# Altium PCB Grabber.PCBDOC (part 4 of 5)
Units mil, origin at the board's own origin, x right, y up, seen from the top; angles counter-clockwise.
Board outline 2854.33 x 3937 mil, 4 copper layers (TopLayer, Internal Plane 2, Layer 1, Bottom Layer), stack 60.752 mil thick; 159 components, 116 nets, 684 pads, 241 vias.
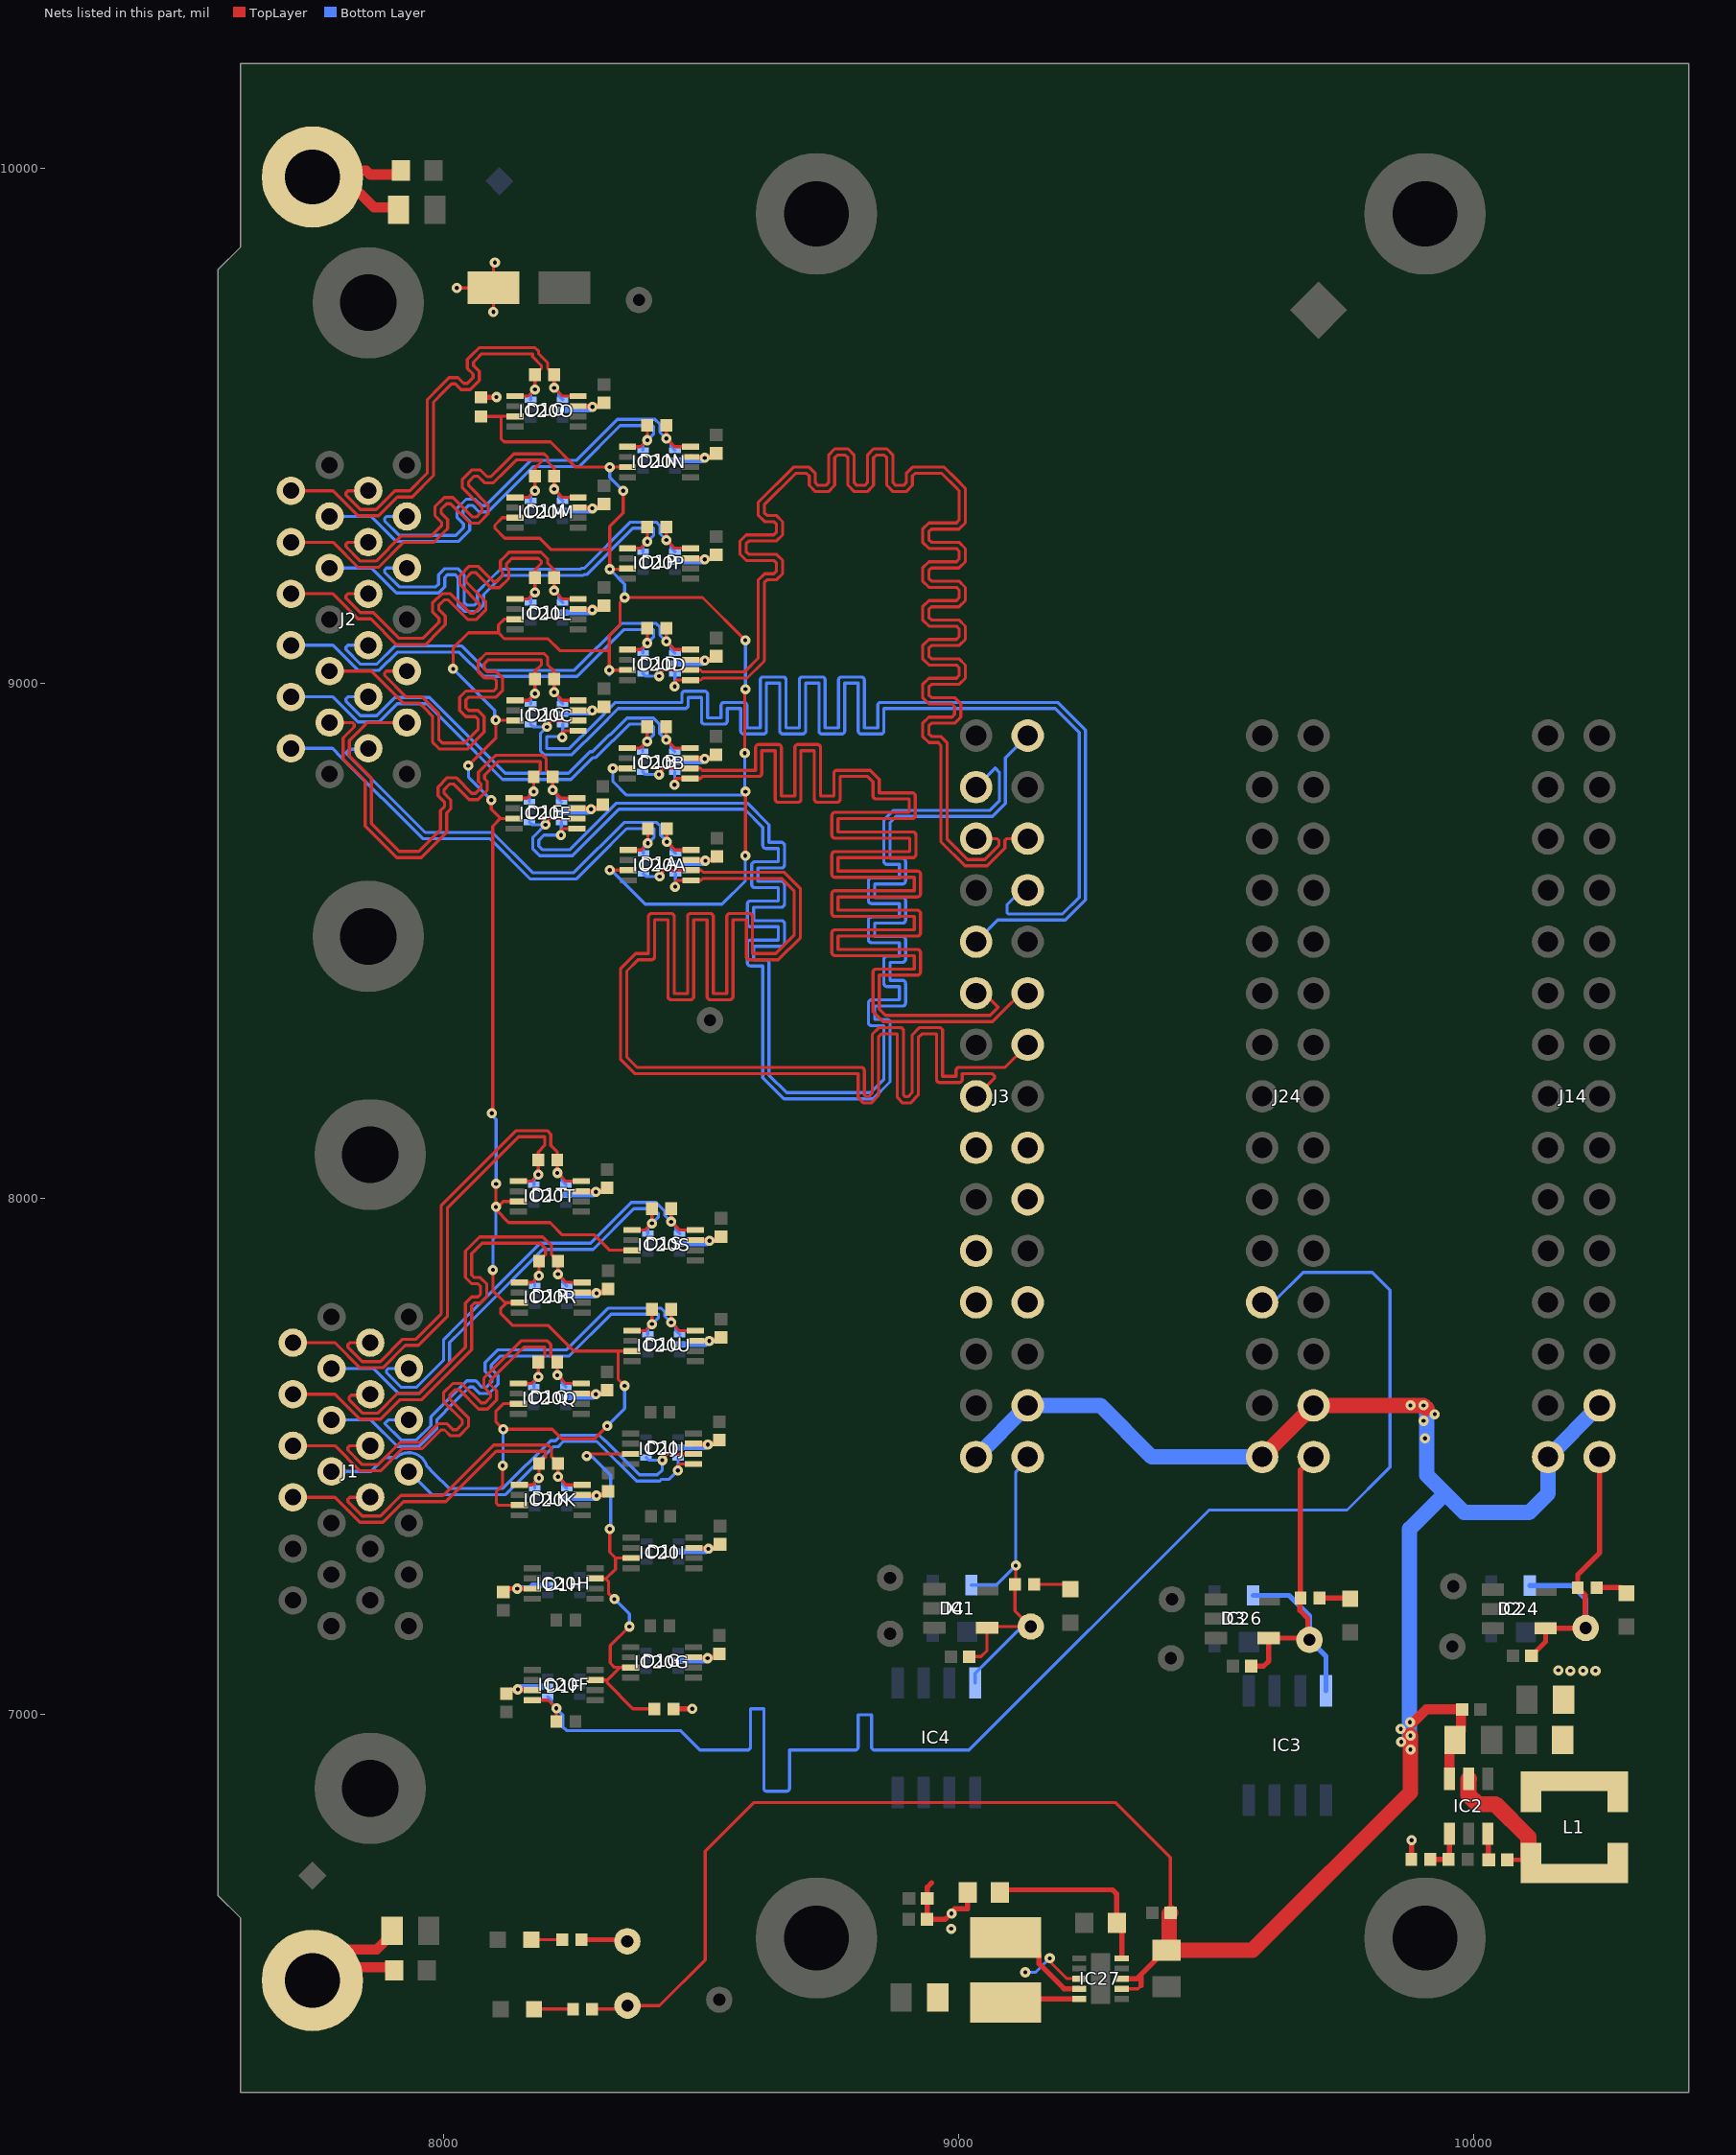
[diagram p5: the nets of this part, all layers, seen from the top]

## Via types
v1: diameter 19.68, hole 7.87, TopLayer to Bottom Layer, tented both sides, 241 vias

## Nets (pads, with @x,y where several pads share a name; then routed paths per layer and width w, separated by ;. In a path a pad name is that pad's centre, name@x,y a point inside that pad or via, vN(x,y) a via of type N, cw(c..) or ccw(c..) an arc to the next point about the centre after c; other vN are vias at no path point) (continued)
LVDS15_P: D1F.4 IC20F.8 J24.23 R131F.2 | length 3074.4
  TopLayer w6: IC20F.8@8172.65,7026.79 8203.4,7026.79 v1(8219.31,7010.88) R131F.2@8219.31,6985.45
  Bottom Layer w6: D1F.4@8202.57,7033.68 8210.06,7026.2 8210.06,7020.13 v1(8219.31,7010.88) 8231.81,6998.38 8231.81,6975.03 8238.84,6968 8460.03,6968 8494.51,6933.51 8498.03,6930 8590,6930 ccw(c8590,6936) 8596,6936 8596,7010 8622,7010 8622,6856 ccw(c8628,6856) 8628,6850 8666,6850 ccw(c8666,6856) 8672,6856 8672,6930 8799,6930 ccw(c8799,6936) 8805,6936 8805,6998.27 8831,6998.27 8831,6936 ccw(c8837,6936) 8837,6930 9019.97,6930 9023.49,6933.51 9485.97,7396 9753.97,7396 9833.49,7475.51 9837,7479.03 9837,7822.97 9833.49,7826.49 9802.97,7857 9668.54,7857 9610.55,7799 J24.23@9589,7799
LVDS16_N: D1E.6 IC20E.5 J3.3 | length 2952.3
  TopLayer w6: v1@8225.05,8702.69 v1(8228.36,8706) 8228.36,8714.42 8232.39,8718.44 IC20E.5@8258.95,8718.44
  Bottom Layer w6: D1E.6@8229.03,8731.24 8229.03,8706.67 v1(8228.36,8706) 8196.43,8706 8195.88,8706.55 8185.36,8696.03 8185.36,8684.35 8191.98,8677.73 8245.76,8677.73 8336.03,8768 8589.97,8768 8632,8725.97 8632,8692 8656,8692 cw(c8656,8686) 8662,8686 8662,8648 cw(c8656,8648) 8656,8642 8610.43,8642 8610.43,8616 8656,8616 cw(c8656,8610) 8662,8610 8662,8572 cw(c8656,8572) 8656,8566 8602,8566 8602,8540 8656,8540 cw(c8656,8534) 8662,8534 8662,8496 cw(c8656,8496) 8656,8490 8602,8490 8602,8464 8626,8464 cw(c8626,8458) 8632,8458 8632,8240 8666,8206 8829,8206 8855,8232 8855,8336 8831,8336 cw(c8831,8342) 8825,8342 8825,8380 cw(c8831,8380) 8831,8386 8885,8386 8885,8412 8861,8412 cw(c8861,8418) 8855,8418 8855,8465 cw(c8861,8465) 8861,8471 8885,8471 8885,8497 8831,8497 cw(c8831,8503) 8825,8503 8825,8541 cw(c8831,8541) 8831,8547 8885,8547 8885,8573 8831,8573 cw(c8831,8579) 8825,8579 8825,8617 cw(c8831,8617) 8831,8623 8885,8623 8885,8649 8861,8649 cw(c8861,8655) 8855,8655 8855,8735.44 8873.56,8754 9061,8754 9078.97,8771.97 9078.97,8828.03 9071,8836 J3.3@9034,8799
LVDS16_P: D1E.1 IC20E.6 J3.2 | length 3040
  TopLayer w6: v1(8198.36,8726) 8198.36,8728.72 8207.77,8738.13 IC20E.6@8258.95,8738.13
  Bottom Layer w6: D1E.1@8166.83,8731.24 8172.06,8726 v1(8198.36,8726) 8176.87,8704.51 8173.36,8701 8173.36,8679.38 8176.87,8675.87 8183.49,8669.25 8187.01,8665.73 8250.73,8665.73 8341,8756 8585,8756 8620,8721 8620,8686 ccw(c8626,8686) 8626,8680 8650,8680 8650,8654 8604.43,8654 ccw(c8604.43,8648) 8598.43,8648 8598.43,8610 ccw(c8604.43,8610) 8604.43,8604 8650,8604 8650,8578 8596,8578 ccw(c8596,8572) 8590,8572 8590,8534 ccw(c8596,8534) 8596,8528 8650,8528 8650,8502 8596,8502 ccw(c8596,8496) 8590,8496 8590,8458 ccw(c8596,8458) 8596,8452 8620,8452 8620,8235.03 8661.03,8194 8833.97,8194 8867,8227.03 8867,8342 ccw(c8861,8342) 8861,8348 8837,8348 8837,8374 8891,8374 ccw(c8891,8380) 8897,8380 8897,8418 ccw(c8891,8418) 8891,8424 8867,8424 8867,8459 8891,8459 ccw(c8891,8465) 8897,8465 8897,8503 ccw(c8891,8503) 8891,8509 8837,8509 8837,8535 8891,8535 ccw(c8891,8541) 8897,8541 8897,8579 ccw(c8891,8579) 8891,8585 8837,8585 8837,8611 8891,8611 ccw(c8891,8617) 8897,8617 8897,8655 ccw(c8891,8655) 8891,8661 8867,8661 8867,8730.46 8878.54,8742 9065.97,8742 9090.97,8767 9090.97,8828.03 9090.97,8855.97 J3.2@9134,8899
LVDS17_N: D1D.6 IC20D.5 J3.6 | length 2990.4
  TopLayer w6: v1(8448.83,8994.39) 8448.83,9002.8 8452.86,9006.83 IC20D.5@8479.43,9006.83 8499.16,9006.83 8503,9010.67 8589.64,9010.67 8619.49,9040.51 8623,9044.03 8623,9185.21 8623,9196.16 8628.14,9201.29 8646.27,9201.29 8658.43,9213.46 8658.43,9238.81 8646.27,9250.98 8592.7,9250.98 8587.57,9256.11 8587.57,9271.53 8592.7,9276.66 8646.27,9276.66 8658.43,9288.83 8658.43,9314.18 8646.27,9326.35 8628.14,9326.35 8623,9331.48 8623,9338 8623,9347 8684.09,9408.09 8693,9408.09 8704.78,9408.09 8709.92,9402.95 8709.92,9384.82 8722.09,9372.65 8747.44,9372.65 8759.61,9384.82 8759.61,9438.38 8764.74,9443.52 8780.15,9443.52 8785.29,9438.38 8785.29,9384.82 8797.46,9372.65 8822.81,9372.65 8834.98,9384.82 8834.98,9438.38 8840.11,9443.52 8855.52,9443.52 8860.66,9438.38 8860.66,9384.82 8872.83,9372.65 8898.18,9372.65 8910.35,9384.82 8910.35,9402.95 8915.48,9408.09 8967.15,9408.09 8995.88,9379.36 9001.02,9374.22 9001.02,9332.4 ; 9001.02,9327.98 9001.02,9332.4 ; J3.6@9134,8699 9093.52,8699 9090,8695.49 9090,8680.76 9055.75,8646.5 9012.26,8646.5 8965.59,8693.18 8965.59,8826.16 8965.59,8880.18 8960.45,8885.32 8942.32,8885.32 8930.15,8897.49 8930.15,8922.84 8942.32,8935.01 8987.12,8935.01 8992.25,8940.14 8992.25,8955.55 8987.12,8960.69 8942.32,8960.69 8930.15,8972.86 8930.15,8998.21 8942.32,9010.38 8995.88,9010.38 9001.02,9015.51 9001.02,9030.92 8995.88,9036.06 8942.32,9036.06 8930.15,9048.23 8930.15,9073.58 8942.32,9085.75 8995.88,9085.75 9001.02,9090.88 9001.02,9106.29 8995.88,9111.43 8942.32,9111.43 8930.15,9123.6 8930.15,9148.95 8942.32,9161.12 8995.88,9161.12 9001.02,9166.25 9001.02,9181.66 8995.88,9186.8 8942.32,9186.8 8930.15,9198.97 8930.15,9224.32 8942.32,9236.49 8995.88,9236.49 9001.02,9241.62 9001.02,9257.03 8995.88,9262.17 8942.32,9262.17 8930.15,9274.34 8930.15,9299.69 8942.32,9311.86 8995.88,9311.86 9001.02,9316.99 9001.02,9332.4
  Bottom Layer w6: v1(8448.83,8994.39) 8449.5,8995.06 D1D.6@8449.5,9019.62
LVDS17_P: D1D.1 IC20D.6 J3.5 | length 3005.3
  TopLayer w6: v1(8418.83,9014.39) 8418.83,9017.1 8428.24,9026.51 IC20D.6@8479.43,9026.51 8499.16,9026.51 8503,9022.67 8584.67,9022.67 8611,9049 8611,9185.21 8611,9201.13 8623.17,9213.29 8641.3,9213.29 8646.43,9218.43 8646.43,9233.84 8641.3,9238.98 8587.73,9238.98 8575.57,9251.14 8575.57,9276.5 8587.73,9288.66 8641.3,9288.66 8646.43,9293.8 8646.43,9309.21 8641.3,9314.35 8623.17,9314.35 8611,9326.51 8611,9338 8611,9351.97 8679.12,9420.09 8693,9420.09 8709.75,9420.09 8721.92,9407.92 8721.92,9389.79 8727.06,9384.65 8742.47,9384.65 8747.61,9389.79 8747.61,9443.35 8759.77,9455.52 8785.12,9455.52 8797.29,9443.35 8797.29,9389.79 8802.43,9384.65 8817.84,9384.65 8822.98,9389.79 8822.98,9443.35 8835.14,9455.52 8860.49,9455.52 8872.66,9443.35 8872.66,9389.79 8877.8,9384.65 8893.21,9384.65 8898.35,9389.79 8898.35,9407.92 8910.51,9420.09 8920.45,9420.09 8972.12,9420.09 8995.88,9396.33 9013.02,9379.19 9013.02,9337.38 ; 9013.02,9332.95 9013.02,9337.38 ; J3.5@9034,8699 9074.49,8699 9078,8695.49 9078,8685.73 9050.78,8658.5 9017.23,8658.5 8977.59,8698.15 8977.59,8826.16 8977.59,8885.16 8965.42,8897.32 8947.29,8897.32 8942.15,8902.46 8942.15,8917.87 8947.29,8923.01 8992.09,8923.01 9004.25,8935.17 9004.25,8960.53 8992.09,8972.69 8947.29,8972.69 8942.15,8977.83 8942.15,8993.24 8947.29,8998.38 9000.85,8998.38 9013.02,9010.54 9013.02,9035.9 9000.85,9048.06 8947.29,9048.06 8942.15,9053.2 8942.15,9068.61 8947.29,9073.75 9000.85,9073.75 9013.02,9085.91 9013.02,9111.27 9000.85,9123.43 8947.29,9123.43 8942.15,9128.57 8942.15,9143.98 8947.29,9149.12 9000.85,9149.12 9013.02,9161.28 9013.02,9186.64 9000.85,9198.8 8947.29,9198.8 8942.15,9203.94 8942.15,9219.35 8947.29,9224.49 9000.85,9224.49 9013.02,9236.65 9013.02,9262.01 9000.85,9274.17 8947.29,9274.17 8942.15,9279.31 8942.15,9294.72 8947.29,9299.86 9000.85,9299.86 9013.02,9312.02 9013.02,9337.38
  Bottom Layer w6: D1D.1@8387.3,9019.62 8392.54,9014.39 v1(8418.83,9014.39)
LVDS18_N: D1C.6 IC20C.5 J3.9 | length 3068.2
  TopLayer w6: v1@8229.76,8897.12 v1(8230.92,8895.96) ; v1@8232.39,8894.5 v1(8230.92,8895.96) ; IC20C.5@8261.51,8908.4 8234.94,8908.4 8230.92,8904.38 v1(8230.92,8895.96)
  Bottom Layer w6: D1C.6@8231.59,8921.2 8231.59,8896.63 v1(8230.92,8895.96) 8229.76,8897.12 8200.59,8897.12 8200.59,8874 8244.79,8874 8291.89,8921.11 8334.27,8963.49 8463,8963.49 8463,8979.22 cw(c8469,8979.22) 8469,8985.22 8507,8985.22 cw(c8507,8979.22) 8513,8979.22 8513,8933.43 8539,8933.43 8539,8957.49 cw(c8545,8957.49) 8545,8963.49 8583,8963.49 cw(c8583,8957.49) 8589,8957.49 8589,8914.15 8615,8914.15 8615,9006.82 cw(c8621,9006.82) 8621,9012.82 8659,9012.82 cw(c8659,9006.82) 8665,9006.82 8665,8914.15 8691,8914.15 8691,9006.82 cw(c8697,9006.82) 8697,9012.82 8735,9012.82 cw(c8735,9006.82) 8741,9006.82 8741,8914.15 8767,8914.15 8767,9006.82 cw(c8773,9006.82) 8773,9012.82 8811,9012.82 cw(c8811,9006.82) 8817,9006.82 8817,8914.15 8843,8914.15 8843,8957.49 cw(c8849,8957.49) 8849,8963.49 9150,8963.49 ; J3.9@9034,8499 9076,8541 9206.97,8541 9210.49,8544.51 ; 9150,8963.49 9192.49,8963.49 ; 9150,8963.49 9192.49,8963.49 ; 9192.49,8963.49 9246,8909.97 ; 9192.49,8963.49 9246,8909.97 ; 9210.49,8544.51 9246,8580.03 ; 9210.49,8544.51 9246,8580.03 ; 9246,8580.03 9246,8909.97 ; 9246,8580.03 9246,8909.97
LVDS18_P: D1C.1 IC20C.6 J3.8 | length 3029.8
  TopLayer w6: v1@8200.92,8913.84 v1(8200.92,8915.96) 8200.92,8918.68 8210.33,8928.09 IC20C.6@8261.51,8928.09
  Bottom Layer w6: D1C.1@8169.39,8921.2 8174.62,8915.96 v1(8200.92,8915.96) 8188.59,8903.63 8188.59,8869.03 8195.62,8862 8249.76,8862 8300.38,8912.62 8339.24,8951.49 8469,8951.49 ccw(c8469,8957.49) 8475,8957.49 8475,8973.22 8501,8973.22 8501,8927.43 ccw(c8507,8927.43) 8507,8921.43 8545,8921.43 ccw(c8545,8927.43) 8551,8927.43 8551,8951.49 8577,8951.49 8577,8908.15 ccw(c8583,8908.15) 8583,8902.15 8621,8902.15 ccw(c8621,8908.15) 8627,8908.15 8627,9000.82 8653,9000.82 8653,8908.15 ccw(c8659,8908.15) 8659,8902.15 8697,8902.15 ccw(c8697,8908.15) 8703,8908.15 8703,9000.82 8729,9000.82 8729,8908.15 ccw(c8735,8908.15) 8735,8902.15 8773,8902.15 ccw(c8773,8908.15) 8779,8908.15 8779,9000.82 8805,9000.82 8805,8908.15 ccw(c8811,8908.15) 8811,8902.15 8849,8902.15 ccw(c8849,8908.15) 8855,8908.15 8855,8951.49 9150,8951.49 9187.51,8951.49 ; J3.8@9134,8599 9122,8599 9094,8571 9094,8555 9096,8553 9202,8553 ; 9156,8951.49 9187.51,8951.49 ; 9187.51,8951.49 9234,8905 ; 9187.51,8951.49 9234,8905 ; 9202,8553 9234,8585 ; 9202,8553 9234,8585 ; 9234,8585 9234,8905 ; 9234,8585 9234,8905
LVDS19_N: D1B.6 IC20B.5 J3.12 | length 2967
  TopLayer w6: v1(8448.44,8803.44) 8448.44,8811.86 8452.46,8815.88 IC20B.5@8479.03,8815.88 8498.76,8815.88 8502.61,8819.72 8612,8819.72 ccw(c8612,8825.72) 8618,8825.72 8618,8869.72 8644,8869.72 8644,8775.72 ccw(c8650,8775.72) 8650,8769.72 8688,8769.72 ccw(c8688,8775.72) 8694,8775.72 8694,8869.72 8720,8869.72 8720,8775.72 ccw(c8726,8775.72) 8726,8769.72 8764,8769.72 ccw(c8764,8775.72) 8770,8775.72 8770,8819.72 8823.41,8819.72 8834,8809.13 8834,8782 ccw(c8840,8782) 8840,8776 8904,8776 8904,8750 8760,8750 ccw(c8760,8744) 8754,8744 8754,8706 ccw(c8760,8706) 8760,8700 8904.98,8700 8904.98,8674 8760,8674 ccw(c8760,8668) 8754,8668 8754,8630 ccw(c8760,8630) 8760,8624 8914,8624 8914,8598 8760,8598 ccw(c8760,8592) 8754,8592 8754,8554 ccw(c8760,8554) 8760,8548 8914,8548 8914,8522 8760,8522 ccw(c8760,8516) 8754,8516 8754,8478 ccw(c8760,8478) 8760,8472 8914,8472 8914,8446 8840,8446 ccw(c8840,8440) 8834,8440 8834,8363.46 8853.46,8344 9065.97,8344 9085.49,8363.51 9120.97,8399 J3.12@9134,8399
  Bottom Layer w6: v1(8448.44,8803.44) 8449.11,8804.11 D1B.6@8449.11,8828.68
LVDS19_P: D1B.1 IC20B.6 J3.11 | length 2999.7
  TopLayer w6: v1(8418.44,8823.44) 8418.44,8826.16 8427.85,8835.57 IC20B.6@8479.03,8835.57 8498.76,8835.57 8502.61,8831.72 8606,8831.72 8606,8875.72 cw(c8612,8875.72) 8612,8881.72 8650,8881.72 cw(c8650,8875.72) 8656,8875.72 8656,8781.72 8682,8781.72 8682,8875.72 cw(c8688,8875.72) 8688,8881.72 8726,8881.72 cw(c8726,8875.72) 8732,8875.72 8732,8781.72 8758,8781.72 8758,8825.72 cw(c8764,8825.72) 8764,8831.72 8828.38,8831.72 8846,8814.1 8846,8788 8910,8788 cw(c8910,8782) 8916,8782 8916,8744 cw(c8910,8744) 8910,8738 8766,8738 8766,8712 8910.98,8712 cw(c8910.98,8706) 8916.98,8706 8916.98,8668 cw(c8910.98,8668) 8910.98,8662 8766,8662 8766,8636 8920,8636 cw(c8920,8630) 8926,8630 8926,8592 cw(c8920,8592) 8920,8586 8766,8586 8766,8560 8920,8560 cw(c8920,8554) 8926,8554 8926,8516 cw(c8920,8516) 8920,8510 8766,8510 8766,8484 8920,8484 cw(c8920,8478) 8926,8478 8926,8440 cw(c8920,8440) 8920,8434 8846,8434 8846,8368.43 8858.43,8356 9061,8356 9077,8372 9050,8399 J3.11@9034,8399
  Bottom Layer w6: D1B.1@8386.91,8828.68 8392.14,8823.44 v1(8418.44,8823.44) ; J3.11@9034,8399 J3.11@9050.94,8399
LVDS20_N: D1A.6 IC20A.5 J3.15 | length 2987
  TopLayer w6: v1(8449.82,8605.65) 8449.82,8614.06 8453.84,8618.09 IC20A.5@8480.41,8618.09 8500.14,8618.09 8503.98,8621.93 8656.07,8621.93 8681,8597 8681,8512 8645,8476 8600,8476 8600,8547.61 ccw(c8594,8547.61) 8594,8553.61 8556,8553.61 ccw(c8556,8547.61) 8550,8547.61 8550,8398.39 8524,8398.39 8524,8547.61 ccw(c8518,8547.61) 8518,8553.61 8480,8553.61 ccw(c8480,8547.61) 8474,8547.61 8474,8398.39 8448,8398.39 8448,8547.61 ccw(c8442,8547.61) 8442,8553.61 8404,8553.61 ccw(c8404,8547.61) 8398,8547.61 8398,8476 8373.03,8476 8344.02,8446.99 8344.02,8270.01 8371.03,8243 8805,8243 8805,8196.54 8815.54,8186 8830.46,8186 8844.49,8200.03 8844.49,8314.46 8850.03,8320 8881,8320 8881,8196.54 8891.54,8186 8906.46,8186 8921.73,8201.27 8921.73,8313.21 8928.51,8320 8957,8320 8957,8231.75 ccw(c8963,8231.75) 8963,8225.75 9001,8225.75 ccw(c9001,8231.75) 9007,8231.75 9007,8243 9065,8243 9070,8238 9070,8235 J3.15@9034,8199
  Bottom Layer w6: v1(8449.82,8605.65) 8450.49,8606.32 D1A.6@8450.49,8630.88
LVDS20_P: D1A.1 IC20A.6 J3.14 | length 3051.1
  TopLayer w6: v1(8419.82,8625.65) 8419.82,8628.36 8429.23,8637.77 IC20A.6@8480.41,8637.77 8500.14,8637.77 8503.98,8633.93 8661.04,8633.93 8693,8601.97 8693,8507.03 8649.97,8464 8594,8464 cw(c8594,8470) 8588,8470 8588,8541.61 8562,8541.61 8562,8392.39 cw(c8556,8392.39) 8556,8386.39 8518,8386.39 cw(c8518,8392.39) 8512,8392.39 8512,8541.61 8486,8541.61 8486,8392.39 cw(c8480,8392.39) 8480,8386.39 8442,8386.39 cw(c8442,8392.39) 8436,8392.39 8436,8541.61 8410,8541.61 8410,8470 cw(c8404,8470) 8404,8464 8378,8464 8356.02,8442.02 8356.02,8274.98 8376,8255 8811,8255 cw(c8811,8249) 8817,8249 8817,8201.51 8820.51,8198 8825.49,8198 8832.49,8205 8832.49,8319.43 8845.06,8332 8887,8332 cw(c8887,8326) 8893,8326 8893,8201.51 8896.51,8198 8901.49,8198 8909.73,8206.24 8909.73,8318.18 8923.54,8332 8963,8332 cw(c8963,8326) 8969,8326 8969,8237.75 8995,8237.75 8995,8249 cw(c9001,8249) 9001,8255 9065,8255 9090,8255 J3.14@9134,8299
  Bottom Layer w6: D1A.1@8388.28,8630.88 8393.52,8625.65 v1(8419.82,8625.65)
LVDS21_N: J3.18
LVDS21_P: J3.17
LVDS22_N: J3.21
LVDS22_P: J3.20
LVDS23_N: J3.24
LVDS23_P: J3.23
NetB12_1: B12.1 C1.1 R5.2 | length 384.6
  TopLayer w20: C1.1@7913.05,9919.32 7913.05,9923.97 7865.53,9923.97 7806.49,9983 B12.1@7746,9983 7759,9996 7850.11,9996 7858.08,9988.03 7917.85,9988.03 R5.2@7917.85,9996
NetB13_1: B13.1 C2.1 R6.2 | length 337.1
  TopLayer w20: B13.1@7746,6483 B13.1@7771.38,6508.38 ; C2.1@7900.57,6578.99 7900.57,6573.09 7870.48,6543 7806,6543 B13.1@7771.38,6508.38 ; R6.2@7904.5,6502.22 7904.5,6508.38 B13.1@7771.38,6508.38
NetC4_1: C4.1 IC2.6 | length 51.5
  TopLayer w10: C4.1@10025,6718 10028.2,6721.2 10028.2,6767.05 IC2.6@10027.4,6767.85
NetC4_2: C4.2 IC2.2 L1.1 | length 246.7
  TopLayer w8: C4.2@10064.43,6717 10091,6717 L1.1@10093,6719
  TopLayer w31.5: IC2.2@9990,6874.15 9989,6873.15 9989,6843.45 10007.45,6825 10042,6825 10106,6761 L1.1@10106,6726
NetIC2_4: IC2.4 R10.1 R11.2 | length 79
  TopLayer w10: R10.1@9920,6721 9920,6719.92 9921.92,6718 R11.2@9950.99,6718 ; R11.2@9950,6723 9950.39,6723 9952.6,6725.2 IC2.4@9952.6,6767.85
NetIC27_5: IC27.5 R121.1 R122.2 | length 360.8
  TopLayer w10: R121.1@9080.41,6653.8 9085.41,6658.8 9298.83,6658.8 9306.79,6650.84 R122.2@9306.79,6594.74 9316.63,6584.9 IC27.5@9316.63,6525.84
NetIC27_9: IC27.9 L2.1 | length 194.7
  TopLayer w10: L2.1@9091,6565.99 9123.42,6565.99 9156.01,6533.4 9156.01,6515.17 9204.4,6466.79 IC27.9@9233.95,6466.79
NetLD1_2: LD1.2 R7.2 | length 62
  TopLayer w10: R7.2@10238.5,7245.34 10285.14,7245.34 LD1.2@10296,7234.48
NetLD5_2: LD5.2 R1.1 | length 75.8
  TopLayer w6: LD5.2@8175.88,6427.42 R1.1@8251.67,6427.42
NetLD6_2: LD6.2 R2.2 | length 60.4
  TopLayer w6: LD6.2@8170.48,6562 R2.2@8230.92,6562
NetLD7_2: LD7.2 R3.2 | length 74.3
  TopLayer w6: R3.2@9146.5,7251.56 9207.92,7251.56 LD7.2@9217,7242.48
NetLD8_2: LD8.2 R4.2 | length 60.1
  TopLayer w10: R4.2@9700.5,7225.05 9758.4,7225.05 LD8.2@9759.97,7223.48
P3V3: B10.1 C7.2 C8.2 C47A.2 C47B.2 C47C.2 C47D.2 C47E.2 C47F.2 C47G.2 C47H.2 C47I.2 C47J.2 C47K.2 C47L.2 C47M.2 C47N.2 C47O.2 C47P.2 C47Q.2 C47R.2 C47S.2 C47T.2 C47U.2 C59.2 C62.1 C65.2 C66.2 D1A.5 D1B.5 D1C.5 D1D.5 D1E.5 D1F.5 D1G.5 D1H.5 D1I.5 D1J.5 D1K.5 D1L.5 D1M.5 D1N.5 D1O.5 D1P.5 D1Q.5 D1R.5 D1S.5 D1T.5 D1U.5 IC20A.7 IC20B.7 IC20C.7 IC20D.7 IC20E.7 IC20F.7 IC20G.7 IC20H.7 IC20I.7 IC20J.7 IC20K.7 IC20L.7 IC20M.7 IC20N.7 IC20O.7 IC20P.7 IC20Q.7 IC20R.7 IC20S.7 IC20T.7 IC20U.7 IC27.8 IC27.10 L1.2 L2.2 R2.1 R8.1 R9.1 R10.2 R121.2 | length 3235.8
  TopLayer w6: v1(8026.24,9768) C62.1@8097.1,9768 ; v1(8097.1,9721.43) C62.1@8097.1,9768 ; v1(8100,9817.21) 8097.1,9814.32 C62.1@8097.1,9768 ; IC20C.7@8261.51,8947.77 8261.57,8947.82 8288.95,8947.82 v1(8289,8947.88) 8304.71,8947.88 8304.82,8947.77 C47C.2@8311.71,8954.66 ; v1(9176.85,6525.83) 9176.85,6519.95 9210.33,6486.47 IC27.8@9233.95,6486.47
  TopLayer w10: R8.1@8073,9555.5 8102.46,9555.5 v1(8103,9556.04) ; C47H.2@8116.3,7237.02 8122.6,7243.32 v1(8143.24,7243.32) IC20H.7@8171.29,7243.32 ; C47F.2@8122.46,7039.58 8129.35,7046.47 8129.35,7046.29 8129.66,7045.98 8142.75,7045.98 v1(8144.6,7047.83) 8145.28,7047.15 8171.97,7047.15 IC20F.7@8172.65,7046.47 ; IC20E.7@8258.95,8757.81 8259.86,8756.91 8285.65,8756.91 v1(8286.55,8756) 8288.4,8757.85 8302.22,8757.85 8302.26,8757.81 C47E.2@8309.15,8764.7 ; IC20L.7@8261.51,9144.62 8262.42,9143.72 8288.2,9143.72 v1(8289.11,9142.81) 8290.96,9144.66 8304.78,9144.66 8304.82,9144.62 C47L.2@8311.71,9151.51 ; IC20M.7@8261.51,9341.75 8262.42,9340.84 8288.2,9340.84 v1(8289.11,9339.94) 8290.96,9341.79 8304.78,9341.79 8304.82,9341.75 C47M.2@8311.71,9348.64 ; IC20O.7@8261.51,9538.32 8262.19,9537.64 8288.88,9537.64 v1(8289.56,9536.97) 8291.42,9538.82 8304.5,9538.82 8304.82,9538.5 8304.82,9538.32 C47O.2@8311.71,9545.21 ; IC20Q.7@8267.81,7621.98 8311.12,7621.98 C47Q.2@8318.01,7628.87 ; IC20T.7@8267.81,8014.66 8268.49,8013.98 8295.18,8013.98 v1(8295.86,8013.3) 8297.72,8015.16 8310.8,8015.16 8311.12,8014.84 8311.12,8014.66 C47T.2@8318.01,8021.55 ; R2.1@8267.93,6562 8353.98,6562 B10.1@8356.98,6559 ; IC20K.7@8269.19,7425.17 8269.87,7424.49 8296.56,7424.49 v1(8297.24,7423.82) 8299.09,7425.67 8312.18,7425.67 8312.5,7425.35 8312.5,7425.17 C47K.2@8319.39,7432.06 ; IC20R.7@8269.19,7818.17 8269.87,7817.49 8296.56,7817.49 v1(8297.24,7816.81) 8299.09,7818.66 8312.18,7818.66 8312.5,7818.35 8312.5,7818.17 C47R.2@8319.39,7825.06 ; R9.1@8446.75,7010 v1(8483,7010) ; IC20B.7@8479.03,8855.25 8479.71,8854.57 8506.4,8854.57 v1(8507.08,8853.89) 8508.94,8855.75 8522.02,8855.75 8522.34,8855.43 8522.34,8855.25 C47B.2@8529.23,8862.14 ; IC20D.7@8479.43,9046.2 8480.1,9045.52 8506.8,9045.52 v1(8507.48,9044.84) 8509.33,9046.69 8522.42,9046.69 8522.73,9046.38 8522.73,9046.2 C47D.2@8529.62,9053.09 ; IC20P.7@8479.43,9243.05 8480.33,9242.14 8506.12,9242.14 v1(8507.02,9241.24) 8508.88,9243.09 8522.69,9243.09 8522.73,9243.05 C47P.2@8529.62,9249.94 ; IC20N.7@8479.43,9439.9 8480.33,9438.99 8506.12,9438.99 v1(8507.02,9438.09) 8508.88,9439.94 8522.69,9439.94 8522.73,9439.9 C47N.2@8529.62,9446.79 ; IC20A.7@8480.41,8657.46 8481.09,8656.78 8507.78,8656.78 v1(8508.46,8656.1) 8510.31,8657.95 8523.4,8657.95 8523.72,8657.64 8523.72,8657.46 C47A.2@8530.61,8664.35 ; IC20G.7@8485.33,7110.17 8486.24,7109.27 8512.02,7109.27 v1(8512.93,7108.36) 8514.78,7110.22 8528.6,7110.22 8528.64,7110.17 C47G.2@8535.53,7117.06 ; IC20J.7@8485.61,7524.58 8486.51,7523.68 8512.3,7523.68 v1(8513.2,7522.77) 8515.06,7524.62 8528.87,7524.62 8528.91,7524.58 C47J.2@8535.8,7531.47 ; IC20I.7@8486.71,7322.5 8487.61,7321.59 8513.4,7321.59 v1(8514.31,7320.69) 8516.16,7322.54 8529.97,7322.54 8530.02,7322.5 C47I.2@8536.91,7329.39 ; IC20U.7@8488.68,7724.35 8488.85,7724.17 8515.83,7724.17 v1(8516,7724) 8517.85,7725.85 8531.67,7725.85 8531.99,7725.54 8531.99,7724.35 C47U.2@8538.88,7731.24 ; IC20S.7@8488.68,7919.86 8489.36,7919.18 8516.05,7919.18 v1(8516.73,7918.5) 8518.58,7920.35 8531.67,7920.35 8531.98,7920.04 8531.98,7919.86 C47S.2@8538.87,7926.75 ; C59.2@8938.68,6601.63 C59.2@8939.04,6601.63 ; 8948,6672.76 8939.04,6663.8 C65.2@8939.04,6641.98 C59.2@8939.04,6601.63 ; 8976,6603.6 8974.03,6601.63 C59.2@8939.04,6601.63 ; v1(8986.25,6612.68) 8986.25,6615.3 8992.32,6621.37 8992.32,6622.33 9017.42,6622.33 R121.2@9017.42,6653.8 ; L2.2@9091,6440.01 9098.09,6447.1 IC27.10@9233.95,6447.1 ; R10.2@9878.5,6718 9878.75,6718.25 9878.75,6754.75 v1(9879,6755)
  Bottom Layer w6: D1C.5@8231.59,8940.88 8283.13,8940.88 8289,8946.76 v1(8289,8947.88) ; v1(9129.33,6498.68) 9149.7,6498.68 v1(9176.85,6525.83)
  Bottom Layer w10: v1(8143.24,7243.32) 8145.09,7245.17 8168.04,7245.17 8173.08,7250.21 D1H.5@8202.57,7250.21 ; v1(8144.6,7047.83) 8150.13,7053.36 D1F.5@8202.57,7053.36 ; D1E.5@8229.03,8750.92 8281.47,8750.92 v1(8286.55,8756) ; D1L.5@8231.59,9137.73 8284.03,9137.73 v1(8289.11,9142.81) ; D1M.5@8231.59,9334.86 8284.03,9334.86 v1(8289.11,9339.94) ; D1O.5@8231.59,9531.43 8284.03,9531.43 v1(8289.56,9536.97) ; D1Q.5@8237.89,7615.09 8290.33,7615.09 v1(8295.86,7620.63) ; D1T.5@8237.89,8007.77 8290.33,8007.77 v1(8295.86,8013.3) ; D1K.5@8239.27,7418.28 8291.71,7418.28 v1(8297.24,7423.82) ; D1R.5@8239.27,7811.28 8291.71,7811.28 v1(8297.24,7816.81) ; D1B.5@8449.11,8848.36 8501.55,8848.36 v1(8507.08,8853.89) ; D1D.5@8449.5,9039.31 8501.94,9039.31 v1(8507.48,9044.84) ; D1P.5@8449.5,9236.16 8501.94,9236.16 v1(8507.02,9241.24) ; D1N.5@8449.5,9433.01 8501.94,9433.01 v1(8507.02,9438.09) ; D1A.5@8450.49,8650.57 8502.93,8650.57 v1(8508.46,8656.1) ; D1G.5@8455.41,7103.28 8507.85,7103.28 v1(8512.93,7108.36) ; D1J.5@8455.69,7517.69 8508.13,7517.69 v1(8513.2,7522.77) ; D1I.5@8456.79,7315.61 8509.23,7315.61 v1(8514.31,7320.69) ; D1U.5@8458.76,7717.46 8509.46,7717.46 v1(8516,7724) ; D1S.5@8458.76,7912.97 8511.2,7912.97 v1(8516.73,7918.5)
  other v1: 8985.5,6583.27 10186.95,7083.92 10211.95,7083.92 10235.95,7083.92 10163.95,7084.92
P3V3_MP0: B16.1 C58.2 D2.4 IC24.4 J14.30 R7.1 | length 674.6
  TopLayer w10: C58.2@10111.72,7113 10139.18,7140.46 IC24.4@10139.18,7166.6 10216.6,7166.6 B16.1@10217,7167 10216.09,7167 10216.09,7230.75 R7.1@10201.5,7245.34 10201.5,7270.5 10244,7313 J14.30@10244,7499
  Bottom Layer w10: D2.4@10108.67,7249.28 10190.52,7249.28 10217,7222.8 B16.1@10217,7167
P3V3_MP1: B8.1 C64.2 D3.4 IC3.8 IC26.4 J24.30 R4.1 | length 811.6
  TopLayer w10: C64.2@9567.72,7093 9592,7093 9601.91,7102.91 IC26.4@9601.91,7147.5 9677.5,7147.5 9677.5,7185.82 9662.32,7201 9662.32,7223.87 R4.1@9663.5,7225.05 9663.5,7473.49 J24.30@9689,7499
  Bottom Layer w10: D3.4@9571.4,7230.18 9641.05,7230.18 9681,7190.23 B8.1@9681,7144 9713,7112 IC3.8@9713,7045.3
P3V3_MP2: B6.1 C3.2 D4.4 IC1.4 IC4.8 J3.30 R3.1 | length 779
  TopLayer w6: C3.2@9020.72,7111.47 9043.41,7111.47 9055.18,7123.24 IC1.4@9055.18,7167.6 9057.38,7169.8 B6.1@9140,7169.8 9109.5,7200.3 R3.1@9109.5,7251.56 9111,7253.06 v1(9111,7288.05)
  Bottom Layer w6: D4.4@9024.67,7250.28 9073.23,7250.28 v1(9111,7288.05) 9111,7469.7 9134,7492.71 J3.30@9134,7499 ; IC4.8@9032,7060.6 9032,7079.3 9113.85,7161.15 9128.15,7161.15 B6.1@9133,7166
P12V0: B11.1 C5.2 C6.2 C67.2 C68.2 IC2.3 IC27.2 IC27.3 J3.28 J3.29 J14.28 J14.29 J24.28 J24.29 R1.2 | length 4885.1
  TopLayer w6: R1.2@8288.68,6427.42 8350.8,6427.42 B11.1@8357.38,6434 8419.24,6434 8508,6522.76 8508,6733.81 8602.19,6828 9305,6828 9411.12,6721.88 C67.2@9411.12,6614.43 ; IC27.2@9316.63,6466.79 9348.1,6466.79 9354.03,6472.72
  TopLayer w10: IC27.3@9316.63,6486.47 9346.18,6486.47 9354.03,6494.32 ; 9354.03,6472.72 9354.03,6494.32 ; C68.2@9403.24,6541.59 9401.3,6541.59 9354.03,6494.32
  TopLayer w20: v1@9880,6983 9882,6983 9908,7009 C5.2@9977.28,7009 9975.08,7006.8 9975.08,6968.4 9967,6960.32 C6.2@9967,6959 ; IC2.3@9952.6,6874.15 9952.6,6932.14 9963,6942.54 C6.2@9963,6949
  TopLayer w30: C67.2@9411.12,6614.43 9408.89,6612.2 9408.89,6547.24 C68.2@9403.24,6541.59 9570.59,6541.59 9877,6848 v1(9877,6931) v1(9877,6958) ; J24.29@9589,7499 J24.28@9689,7599 v1(9902.19,7599) v1@9908.19,7593
  Bottom Layer w30: J3.29@9034,7499 J3.28@9134,7599 9275,7599 9375,7499 J24.29@9589,7499 ; v1@9875,6958 9875,7359.23 9943.97,7428.2 ; v1@9908.19,7593 9908.19,7463.98 9943.97,7428.2 ; J14.28@10244,7599 J14.29@10144,7499 10144,7428 10107,7391 9981.17,7391 9943.97,7428.2
  other v1: 9859,6946 9858,6971 9876,6984 9905,7535 9902.19,7569 9924,7582 9877,7599
RX_EN: IC20A.3 IC20B.3 IC20C.3 IC20D.3 IC20E.3 IC20K.3 IC20L.3 IC20M.3 IC20N.3 IC20O.3 IC20P.3 IC20Q.3 IC20R.3 IC20S.3 IC20T.3 IC20U.3 R8.2 | length 5778.1
  TopLayer w6: v1(8018.83,9028.48) 8018.83,9068.53 8048.89,9098.58 8106.94,9098.58 ; v1(8048.56,8840.49) 8101.68,8893.6 v1(8101.68,8929.07) 8102.17,8928.58 8138.97,8928.58 IC20C.3@8139.46,8928.09 ; R8.2@8073,9518.5 8112.5,9518.5 ; v1(8093,8774) 8093,8756.09 8110.96,8738.13 ; v1(8094.19,8166) 8096,8167.81 8096,8723.17 8110.96,8738.13 ; v1(8096.15,7862) 8096.15,7821.85 8119.52,7798.48 8123.13,7798.48 ; v1(8102.17,8029) 8102.11,8028.93 8102.11,7984.32 v1(8102.04,7984.26) ; v1(8115.18,7482) 8115.18,7444.29 8102.77,7431.88 8102.77,7409 8106.29,7405.49 IC20K.3@8147.14,7405.49 ; IC20E.3@8136.91,8738.13 8110.96,8738.13 ; IC20L.3@8139.46,9124.94 8117.84,9124.94 8106.94,9114.03 8106.94,9098.58 ; IC20M.3@8139.46,9322.06 8114.49,9322.06 8100,9307.58 8100,9301.37 8119.37,9282 8187,9282 8209,9260 8323,9260 ; IC20O.3@8139.46,9518.64 8112.64,9518.64 8112.5,9518.5 ; IC20Q.3@8145.76,7602.3 8116.3,7602.3 8102,7588 8102,7567.11 v1(8116.3,7552.81) 8211.19,7552.81 8230,7534 8293,7534 v1(8318,7559) ; IC20T.3@8145.76,7994.98 8116.46,7994.98 8105.74,7984.26 v1(8102.04,7984.26) ; IC20R.3@8147.14,7798.48 8123.13,7798.48 ; v1(8323,8638) 8323.23,8637.77 IC20A.3@8358.36,8637.77 ; v1(8329,8835.57) IC20B.3@8356.98,8835.57 ; v1(8349,9374.23) 8349,9331 8323,9305 8323,9260 ; v1(8352,7637) 8339.21,7649.79 8339.21,7702.45 8337,7704.66 ; IC20D.3@8356.87,9026 v1(8322,9026) 8322,9064 ; IC20P.3@8357.38,9223.36 8356.02,9222 v1(8323,9222) 8323,9260 ; IC20N.3@8357.38,9420.21 8323.21,9420.21 v1(8323,9420) 8257,9420 8208,9469 8118,9469 8111.91,9475.09 8111.91,9517.91 8112.5,9518.5 ; IC20U.3@8366.63,7704.66 8337,7704.66 ; IC20S.3@8366.63,7900.17 8322.83,7900.17 8293,7930 8231,7930 8207,7954 8126.83,7954 8102.04,7978.79 v1(8102.04,7984.26) ; v1(8585,8865) 8585,8987.8 v1(8586.32,8989.11) ; v1(8586,8666) 8586.16,8666.16 8586.16,8790.13 v1(8586.32,8790.29) ; v1(8586,9084) 8503,9167 v1(8352,9167) 8343,9158 8343,9114.46 8322,9093.46 8322,9064 ; 8106.94,9098.58 8118.52,9087 8203,9087 8226,9064 8322,9064 ; 8123.13,7798.48 8111,7786.35 8111,7778 8135,7754 8204,7754 8253.34,7704.66 8337,7704.66
  Bottom Layer w6: v1(8018.83,9028.48) 8099.4,8947.91 8099.4,8931.35 v1(8101.68,8929.07) ; v1(8048.56,8840.49) 8049.06,8839.99 8049.06,8817.94 v1(8093,8774) ; v1(8094.19,8166) 8094.19,8162.3 8102.17,8154.31 v1(8102.17,8029) ; v1(8096.15,7862) 8096.15,7921.49 8102.04,7927.38 v1(8102.04,7984.26) ; v1(8115.18,7482) 8115.74,7482.56 8115.74,7552.25 v1(8116.3,7552.81) ; v1(8318,7559) 8352,7593 v1(8352,7637) ; v1@8322,9016.78 v1(8322,9026) ; v1(8323,8638) 8326,8638 8392,8572 8541,8572 8586,8617 v1(8586,8666) ; v1(8323,9222) 8352,9193 v1(8352,9167) ; v1(8323,9420) 8323,9400.23 v1(8349,9374.23) ; v1(8329,8835.57) 8329,8810.2 8355.8,8783.4 8579.43,8783.4 v1(8586.32,8790.29) 8585,8791.61 v1(8585,8865) ; v1(8586,9084) 8586.16,9083.84 8586.16,8989.27 v1(8586.32,8989.11)
SERRX_N: D1K.3 IC20K.1 J1.19 R131K.1 | length 691.8
  TopLayer w6: J1.19@7707.97,7420.72 7789.3,7420.72 7837.85,7372.17 7882.71,7372.17 7922.66,7412.12 8004.68,7412.12 8102.66,7510.09 8198.03,7510.09 8198.03,7498.7 R131K.1@8185.53,7486.2 v1(8185.53,7457.65) 8172.73,7444.86 IC20K.1@8147.14,7444.86
  Bottom Layer w6: D1K.3@8177.06,7437.97 8177.06,7449.19 v1(8185.53,7457.65)
SERRX_P: D1K.4 IC20K.8 J1.6 R131K.2 | length 659
  TopLayer w6: J1.6@7857.97,7420.72 7818.27,7420.72 7814.75,7417.21 7814.75,7412.24 7842.83,7384.17 7877.74,7384.17 7917.69,7424.12 7999.71,7424.12 8097.69,7522.09 8203,7522.09 8210.03,7515.07 8210.03,7498.7 R131K.2@8222.54,7486.2 v1(8222.54,7460.76) 8238.44,7444.86 IC20K.8@8269.19,7444.86
  Bottom Layer w6: v1(8222.54,7460.76) 8231.79,7451.51 8231.79,7445.45 D1K.4@8239.27,7437.97
SERTX_N: D1J.6 IC20J.5 J1.7 | length 689.8
  TopLayer w6: v1(8455.02,7472.77) 8455.02,7481.19 8459.04,7485.21 IC20J.5@8485.61,7485.21
  Bottom Layer w6: J1.7@7932.97,7470.72 7977.72,7425.97 8006.03,7425.97 8120.62,7425.97 8213.23,7518.58 8222.5,7518.58 8232.92,7529 8298,7529 8374.77,7452.23 8420.2,7452.23 8423.71,7455.74 8437.99,7455.74 v1(8455.02,7472.77) 8455.69,7473.44 D1J.6@8455.69,7498.01
SERTX_P: D1J.1 IC20J.6 J1.20 | length 883.6
  TopLayer w6: v1(8425.02,7492.77) 8425.02,7495.49 8434.43,7504.9 IC20J.6@8485.61,7504.9
  Bottom Layer w6: J1.20@7782.97,7470.72 7859.67,7470.72 7886.95,7498.01 7908.63,7498.01 cw(c7932.97,7470.72) 7968.09,7480.88 7981.57,7467.4 8011,7437.97 8115.65,7437.97 8208.26,7530.58 8217.53,7530.58 8227.95,7541 8302.97,7541 8313.39,7530.58 8314.39,7530.58 8380.74,7464.23 8415.23,7464.23 8425.02,7474.02 v1(8425.02,7492.77) 8398.72,7492.77 D1J.1@8393.48,7498.01
TX_EN: IC20F.3 IC20G.3 IC20H.3 IC20I.3 IC20J.3 R9.2 | length 831.4
  TopLayer w6: v1(8278.36,7501) 8282.26,7504.9 IC20J.3@8363.56,7504.9 ; IC20F.3@8294.7,7066.16 8317.94,7066.16 ; IC20H.3@8294.7,7263.01 8316.01,7263.01 ; v1(8323,7359) 8323,7314 8334.19,7302.81 ; v1(8332,7223.05) 8320.43,7234.61 8320.43,7257.38 8316.01,7261.81 8316.01,7263.01 ; v1(8361,7169.8) 8324,7132.8 8324,7099 8332.51,7090.49 8342.27,7090.49 ; IC20G.3@8363.28,7090.49 8342.27,7090.49 ; IC20I.3@8364.66,7302.81 8334.19,7302.81 ; R9.2@8409.74,7010 8368,7010 8317.94,7060.06 8317.94,7066.16 ; 8316.01,7263.01 8334.19,7281.19 8334.19,7302.81 ; 8317.94,7066.16 8342.27,7090.49
  Bottom Layer w6: v1(8278.36,7501) 8287.61,7501 8325,7463.61 8325,7361 v1(8323,7359) ; v1(8332,7223.05) 8361,7194.05 v1(8361,7169.8)
X0_N: D1T.3 IC20T.1 J1.25 R131T.1 | length 962.9
  TopLayer w6: J1.25@7707.97,7720.72 7789.3,7720.72 7837.85,7672.17 7882.71,7672.17 7925.98,7715.44 7951.71,7715.44 8007.65,7771.38 8007.65,7981.76 8146.22,8120.33 8196.65,8120.33 8196.65,8103.39 8184.15,8090.89 R131T.1@8184.15,8075.69 v1(8184.15,8047.14) 8171.35,8034.35 IC20T.1@8145.76,8034.35
  Bottom Layer w6: D1T.3@8175.69,8027.46 8175.69,8038.68 v1(8184.15,8047.14)
X0_P: D1T.4 IC20T.8 J1.12 R131T.2 | length 930.2
  TopLayer w6: J1.12@7857.97,7720.72 7818.27,7720.72 7814.75,7717.21 7814.75,7712.24 7842.83,7684.17 7877.74,7684.17 7921.01,7727.44 7946.74,7727.44 7995.65,7776.35 7995.65,7986.73 8141.25,8132.33 8201.62,8132.33 8208.65,8125.3 8208.65,8103.39 8221.16,8090.89 R131T.2@8221.16,8075.69 v1(8221.16,8050.25) 8237.06,8034.35 IC20T.8@8267.81,8034.35
  Bottom Layer w6: v1(8221.16,8050.25) 8230.41,8041 8230.41,8034.94 D1T.4@8237.89,8027.46
X1_N: D1S.3 IC20S.1 J1.24 R131S.1 | length 950
  TopLayer w6: IC20S.1@8366.63,7939.54 8392.22,7939.54 v1(8405.02,7952.34) R131S.1@8405.02,7980.88
  Bottom Layer w6: J1.24@7782.97,7670.72 7864.3,7670.72 7912.85,7622.17 7953.08,7622.17 8012.21,7681.29 8012.21,7721.24 8033.92,7742.95 8076.71,7785.74 8192.92,7901.95 8290.85,7901.95 8369.78,7980.88 8407.68,7980.88 8417.52,7971.04 8417.52,7964.84 v1(8405.02,7952.34) 8396.55,7943.87 D1S.3@8396.55,7932.65
X1_P: D1S.4 IC20S.8 J1.11 R131S.2 | length 914.2
  TopLayer w6: R131S.2@8442.02,7980.88 v1(8442.02,7955.45) 8457.93,7939.54 IC20S.8@8488.68,7939.54
  Bottom Layer w6: J1.11@7932.97,7670.72 7893.27,7670.72 7889.75,7667.21 7889.75,7662.24 7917.83,7634.17 7948.11,7634.17 8000.21,7686.26 8000.21,7726.21 8025.43,7751.43 8071.74,7797.74 8187.95,7913.95 8285.88,7913.95 8364.81,7992.88 8412.65,7992.88 8429.52,7976.01 8429.52,7967.95 v1(8442.02,7955.45) 8451.28,7946.2 8451.28,7940.13 D1S.4@8458.76,7932.65
X2_N: D1R.3 IC20R.1 J1.23 R131R.1 | length 928.9
  TopLayer w6: J1.23@7707.97,7620.72 7789.3,7620.72 7837.85,7572.17 7878.08,7572.17 7916.08,7610.17 7958.05,7610.17 8054.82,7706.93 8054.82,7770.53 8054.82,7792.36 8059.96,7797.5 8071.98,7797.5 8084.15,7809.66 8084.15,7835.02 8071.98,7847.18 8059.96,7847.18 8054.82,7852.32 8054.82,7858.83 8054.82,7893.54 8075.23,7913.95 8187.87,7913.95 8198.03,7903.8 8198.03,7891.69 R131R.1@8185.53,7879.19 v1(8185.53,7850.65) 8172.73,7837.85 IC20R.1@8147.14,7837.85
  Bottom Layer w6: D1R.3@8177.06,7830.96 8177.06,7842.18 v1(8185.53,7850.65)
X2_P: D1R.4 IC20R.8 J1.10 R131R.2 | length 891.1
  TopLayer w6: J1.10@7857.97,7620.72 7856.14,7618.9 7821.41,7618.9 7817.24,7614.72 7817.24,7609.75 7842.83,7584.17 7873.11,7584.17 7911.11,7622.17 7953.08,7622.17 8042.82,7711.9 8042.82,7770.53 8042.82,7797.33 8054.99,7809.5 8067.01,7809.5 8072.15,7814.63 8072.15,7830.05 8067.01,7835.18 8054.99,7835.18 8042.82,7847.35 8042.82,7858.83 8042.82,7898.51 8070.26,7925.95 8192.84,7925.95 8210.03,7908.77 8210.03,7891.69 R131R.2@8222.54,7879.19 v1(8222.54,7853.76) 8238.44,7837.85 IC20R.8@8269.19,7837.85
  Bottom Layer w6: v1(8222.54,7853.76) 8231.79,7844.5 8231.79,7838.44 D1R.4@8239.27,7830.96
X3_N: D1Q.3 IC20Q.1 J1.21 R131Q.1 | length 906
  TopLayer w6: J1.21@7707.97,7520.72 7789.3,7520.72 7837.85,7472.17 7878.08,7472.17 7921.07,7515.16 7958.82,7515.16 7960.58,7516.91 7994.99,7551.32 8002.25,7551.32 8013.61,7539.97 8030.81,7539.97 8048.74,7557.89 8048.74,7575.1 8012.33,7611.51 8012.33,7618.78 8023.22,7629.67 8030.49,7629.67 8068.36,7591.8 8085.57,7591.8 8103.5,7609.73 8103.5,7626.93 8090.68,7639.75 8090.68,7647.02 8095.28,7651.62 8155.89,7712.23 8196.65,7712.23 8196.65,7695.51 R131Q.1@8184.15,7683.01 v1(8184.15,7654.46) 8171.35,7641.67 IC20Q.1@8145.76,7641.67
  Bottom Layer w6: D1Q.3@8175.69,7634.78 8175.69,7646 v1(8184.15,7654.46)
X3_P: D1Q.4 IC20Q.8 J1.8 R131Q.2 | length 873.2
  TopLayer w6: J1.8@7857.97,7520.72 7818.27,7520.72 7814.75,7517.21 7814.75,7512.24 7842.83,7484.17 7873.11,7484.17 7916.1,7527.16 7950.33,7527.16 7953.85,7527.16 7990.01,7563.32 8007.22,7563.32 8018.58,7551.97 8025.84,7551.97 8036.74,7562.86 8036.74,7570.13 8000.33,7606.54 8000.33,7623.75 8018.25,7641.67 8035.46,7641.67 8073.33,7603.8 8080.6,7603.8 8091.5,7614.7 8091.5,7621.96 8078.68,7634.78 8078.68,7651.99 8086.8,7660.11 8150.92,7724.23 8201.62,7724.23 8208.65,7717.2 8208.65,7695.51 R131Q.2@8221.16,7683.01 v1(8221.16,7657.57) 8237.06,7641.67 IC20Q.8@8267.81,7641.67
  Bottom Layer w6: v1(8221.16,7657.57) 8230.41,7648.32 8230.41,7642.26 D1Q.4@8237.89,7634.78
XCLK_N: D1U.3 IC20U.1 J1.22 R131U.1 | length 942.2
  TopLayer w6: IC20U.1@8366.63,7744.03 8392.22,7744.03 v1(8405.02,7756.83) R131U.1@8405.02,7785.37
  Bottom Layer w6: J1.22@7782.97,7570.72 7859.67,7570.72 7911.11,7519.28 7952.13,7519.28 7987.63,7554.78 7987.63,7571.75 8019.86,7603.98 8050.68,7634.81 8057.95,7634.81 8070.77,7621.99 8087.97,7621.99 8105.9,7639.92 8105.9,7657.12 8093.08,7669.94 8093.08,7677.21 8097.69,7681.81 8110.82,7694.94 8244.35,7694.94 8325.41,7776 8417.05,7776 8417.52,7775.53 8417.52,7769.33 v1(8405.02,7756.83) 8396.55,7748.36 D1U.3@8396.55,7737.14
XCLK_P: D1U.4 IC20U.8 J1.9 R131U.2 | length 910.9
  TopLayer w6: R131U.2@8442.03,7785.37 v1(8442.03,7759.94) 8457.93,7744.03 IC20U.8@8488.68,7744.03
  Bottom Layer w6: J1.9@7932.97,7570.72 7892.57,7570.72 7886.04,7564.19 7918.95,7531.28 7947.16,7531.28 7975.63,7559.75 7975.63,7576.73 8011.37,7612.47 8045.71,7646.81 8062.92,7646.81 8075.74,7633.99 8083,7633.99 8093.9,7644.89 8093.9,7652.15 8081.08,7664.97 8081.08,7682.18 8089.2,7690.3 8105.85,7706.94 8239.38,7706.94 8320.44,7788 8422.02,7788 8429.52,7780.5 8429.52,7772.44 v1(8442.03,7759.94) 8451.28,7750.68 8451.28,7744.62 D1U.4@8458.76,7737.14
Y0_N: D1O.3 IC20O.1 J2.25 R131O.1 | length 896.8
  TopLayer w6: J2.25@7704.23,9374.27 7785.56,9374.27 7834.11,9325.71 7874.34,9325.71 7910.86,9362.23 7939.5,9362.23 7980.84,9403.57 7980.84,9546.35 8001.12,9566.63 8016.15,9581.67 8023.42,9581.67 8034.51,9570.57 8051.72,9570.57 8069.64,9588.5 8069.64,9605.7 8058.55,9616.8 8058.55,9624.06 8063.16,9628.67 8074.5,9640.02 8172.93,9640.02 8172.93,9634.88 8190.35,9617.46 8190.35,9611.85 R131O.1@8177.85,9599.35 v1(8177.85,9570.8) 8165.06,9558.01 IC20O.1@8139.46,9558.01
  Bottom Layer w6: D1O.3@8169.39,9551.12 8169.39,9562.34 v1(8177.85,9570.8)
Y0_P: D1O.4 IC20O.8 J2.12 R131O.2 | length 864.1
  TopLayer w6: J2.12@7854.23,9374.27 7814.53,9374.27 7811.01,9370.75 7811.01,9365.78 7839.09,9337.71 7869.37,9337.71 7905.89,9374.23 7934.53,9374.23 7968.84,9408.54 7968.84,9551.32 7992.63,9575.11 8011.18,9593.67 8028.39,9593.67 8039.48,9582.57 8046.75,9582.57 8057.64,9593.47 8057.64,9600.73 8046.55,9611.83 8046.55,9629.03 8054.67,9637.15 8069.53,9652.02 8177.9,9652.02 8184.93,9644.99 8184.93,9639.85 8202.35,9622.43 8202.35,9611.85 R131O.2@8214.86,9599.35 v1(8214.86,9573.91) 8230.76,9558.01 IC20O.8@8261.51,9558.01
  Bottom Layer w6: v1(8214.86,9573.91) 8224.11,9564.66 8224.11,9558.6 D1O.4@8231.59,9551.12
Y1_N: D1N.3 IC20N.1 J2.24 R131N.1 | length 920.6
  TopLayer w6: IC20N.1@8357.38,9459.58 8382.97,9459.58 v1(8395.76,9472.38) R131N.1@8395.76,9500.92
  Bottom Layer w6: J2.24@7779.23,9324.27 7860.56,9324.27 7909.11,9275.71 8029.09,9275.71 8043,9289.61 8051.12,9297.73 8051.12,9314.94 8038.3,9327.76 8038.3,9335.02 8049.2,9345.92 8056.46,9345.92 8069.28,9333.1 8086.49,9333.1 8111.02,9357.63 8174.39,9421.01 8263.02,9421.01 8342.93,9500.92 8405.63,9500.92 8408.27,9498.28 8408.27,9484.88 v1(8395.76,9472.38) 8387.3,9463.91 D1N.3@8387.3,9452.69
Y1_P: D1N.4 IC20N.8 J2.11 R131N.2 | length 884.8
  TopLayer w6: R131N.2@8432.77,9500.92 v1(8432.77,9475.49) 8448.68,9459.58 IC20N.8@8479.43,9459.58
  Bottom Layer w6: J2.11@7929.23,9324.27 7889.53,9324.27 7886.01,9320.75 7886.01,9315.78 7914.09,9287.71 8024.12,9287.71 8034.51,9298.1 8039.12,9302.7 8039.12,9309.97 8026.3,9322.79 8026.3,9339.99 8044.23,9357.92 8061.43,9357.92 8074.25,9345.1 8081.52,9345.1 8102.53,9366.12 8169.42,9433.01 8258.05,9433.01 8337.96,9512.92 8410.6,9512.92 8420.27,9503.25 8420.27,9487.99 v1(8432.77,9475.49) 8442.02,9466.24 8442.02,9460.17 D1N.4@8449.5,9452.69
Y2_N: D1M.3 IC20M.1 J2.23 R131M.1 | length 896.4
  TopLayer w6: J2.23@7704.23,9274.27 7785.56,9274.27 7834.11,9225.71 7874.34,9225.71 7922.99,9274.35 7981.87,9274.35 8000.4,9292.88 8008.52,9301.01 8008.52,9318.21 7995.7,9331.03 7995.7,9338.3 8006.6,9349.19 8013.86,9349.19 8051.74,9311.32 8068.94,9311.32 8086.87,9329.25 8086.87,9346.45 8048.99,9384.33 8048.99,9391.59 8059.89,9402.49 8067.16,9402.49 8079.98,9389.67 8097.18,9389.67 8119.91,9412.4 8141.51,9433.99 8190.35,9433.99 8190.35,9430.48 8177.85,9417.98 R131M.1@8177.85,9402.77 v1(8177.85,9374.23) 8165.06,9361.43 IC20M.1@8139.46,9361.43
  Bottom Layer w6: D1M.3@8169.39,9354.54 8169.39,9365.76 v1(8177.85,9374.23)
Y2_P: D1M.4 IC20M.8 J2.10 R131M.2 | length 863.6
  TopLayer w6: J2.10@7854.23,9274.27 7814.53,9274.27 7811.01,9270.75 7811.01,9265.78 7839.09,9237.71 7869.37,9237.71 7918.02,9286.35 7976.9,9286.35 7991.91,9301.37 7996.52,9305.98 7996.52,9313.24 7983.7,9326.06 7983.7,9343.27 8001.63,9361.19 8018.83,9361.19 8056.71,9323.32 8063.97,9323.32 8074.87,9334.22 8074.87,9341.48 8036.99,9379.36 8036.99,9396.56 8054.92,9414.49 8072.13,9414.49 8084.95,9401.67 8092.21,9401.67 8111.43,9420.88 8136.54,9445.99 8195.32,9445.99 8202.35,9438.96 8202.35,9430.48 8214.86,9417.98 R131M.2@8214.86,9402.77 v1(8214.86,9377.34) 8230.76,9361.43 IC20M.8@8261.51,9361.43
  Bottom Layer w6: v1(8214.86,9377.34) 8224.11,9368.09 8224.11,9362.02 D1M.4@8231.59,9354.54
Y3_N: D1L.3 IC20L.1 J2.21 R131L.1 | length 939.7
  TopLayer w6: J2.21@7704.23,9174.27 7785.56,9174.27 7834.11,9125.71 7859.11,9125.71 7909.11,9075.71 7965.29,9075.71 7992.63,9103.05 8003.76,9114.18 8003.76,9131.38 7990.94,9144.2 7990.94,9151.47 8001.84,9162.36 8009.1,9162.36 8046.98,9124.49 8064.18,9124.49 8082.11,9142.42 8082.11,9159.62 8044.23,9197.5 8044.23,9204.76 8055.13,9215.66 8062.4,9215.66 8091.83,9186.22 8109.04,9186.22 8126.97,9204.15 8126.97,9221.35 8122.58,9225.74 8122.58,9233 8127.19,9237.61 8132.63,9243.05 8184.45,9243.05 8190.35,9237.14 8190.35,9233.35 8177.85,9220.85 R131L.1@8177.85,9205.65 v1(8177.85,9177.1) 8165.06,9164.31 IC20L.1@8139.46,9164.31
  Bottom Layer w6: D1L.3@8169.39,9157.42 8169.39,9168.64 v1(8177.85,9177.1)
Y3_P: D1L.4 IC20L.8 J2.8 R131L.2 | length 907
  TopLayer w6: J2.8@7854.23,9174.27 7814.53,9174.27 7811.01,9170.75 7811.01,9165.78 7839.09,9137.71 7864.09,9137.71 7914.09,9087.71 7960.32,9087.71 7984.15,9111.53 7991.76,9119.15 7991.76,9126.41 7978.94,9139.23 7978.94,9156.44 7996.87,9174.36 8014.07,9174.36 8051.95,9136.49 8059.21,9136.49 8070.11,9147.39 8070.11,9154.65 8032.23,9192.53 8032.23,9209.73 8050.16,9227.66 8067.37,9227.66 8096.8,9198.22 8104.07,9198.22 8114.97,9209.12 8114.97,9216.38 8110.58,9220.77 8110.58,9237.97 8118.7,9246.09 8127.66,9255.05 8189.42,9255.05 8202.35,9242.11 8202.35,9233.35 8214.86,9220.85 R131L.2@8214.86,9205.65 v1(8214.86,9180.21) 8230.76,9164.31 IC20L.8@8261.51,9164.31
  Bottom Layer w6: v1(8214.86,9180.21) 8224.11,9170.96 8224.11,9164.9 D1L.4@8231.59,9157.42
YCLK_N: D1P.3 IC20P.1 J2.22 R131P.1 | length 940.3
  TopLayer w6: IC20P.1@8357.38,9262.73 8382.97,9262.73 v1(8395.76,9275.53) R131P.1@8395.76,9304.07
  Bottom Layer w6: J2.22@7779.23,9224.27 7860.56,9224.27 7909.11,9175.71 7978.94,9175.71 7990.42,9175.71 8002.59,9187.88 8002.59,9206 8007.73,9211.14 8023.14,9211.14 8028.28,9206 8028.28,9152.44 8040.44,9140.28 8065.79,9140.28 8077.96,9152.44 8077.96,9172.64 8091.69,9186.37 8115.32,9210 8271.46,9210 8273.12,9211.65 8278.13,9211.65 8367.91,9301.43 8408.27,9301.43 8408.27,9288.03 v1(8395.76,9275.53) 8387.3,9267.06 D1P.3@8387.3,9255.84
YCLK_P: D1P.4 IC20P.8 J2.9 R131P.2 | length 904.4
  TopLayer w6: R131P.2@8432.77,9304.07 v1(8432.77,9278.64) 8448.68,9262.73 IC20P.8@8479.43,9262.73
  Bottom Layer w6: J2.9@7929.23,9224.27 7889.53,9224.27 7886.01,9220.75 7886.01,9215.78 7914.09,9187.71 7978.94,9187.71 7985.45,9187.71 7990.59,9192.85 7990.59,9210.98 8002.76,9223.14 8028.11,9223.14 8040.28,9210.98 8040.28,9157.41 8045.41,9152.28 8060.82,9152.28 8065.96,9157.41 8065.96,9177.61 8091.69,9203.34 8110.35,9222 8266.49,9222 8268.15,9223.65 8273.16,9223.65 8362.93,9313.43 8413.24,9313.43 8420.27,9306.4 8420.27,9291.14 v1(8432.77,9278.64) 8442.02,9269.39 8442.02,9263.32 D1P.4@8449.5,9255.84
Z0_N: D1D.3 IC20D.1 J2.19 R131D.1 | length 922.3
  TopLayer w6: IC20D.1@8357.38,9065.88 8382.97,9065.88 v1(8395.76,9078.68) R131D.1@8395.76,9107.22
  Bottom Layer w6: J2.19@7704.23,9074.27 7785.56,9074.27 7834.11,9025.71 7875.63,9025.71 7910.74,9060.83 8031.05,9060.83 8078.03,9013.84 8259.35,9013.84 8350.09,9104.58 8408.27,9104.58 8408.27,9091.18 v1(8395.76,9078.68) 8387.3,9070.21 D1D.3@8387.3,9058.99
Z0_P: D1D.4 IC20D.8 J2.6 R131D.2 | length 886.4
  TopLayer w6: R131D.2@8432.77,9107.22 v1(8432.77,9081.79) 8448.68,9065.88 IC20D.8@8479.43,9065.88
  Bottom Layer w6: J2.6@7854.23,9074.27 7814.53,9074.27 7811.01,9070.75 7811.01,9065.78 7839.09,9037.71 7870.65,9037.71 7905.77,9072.83 8036.02,9072.83 8083,9025.84 8254.38,9025.84 8345.12,9116.58 8413.24,9116.58 8420.27,9109.55 8420.27,9094.29 v1(8432.77,9081.79) 8442.02,9072.54 8442.02,9066.47 D1D.4@8449.5,9058.99
Z1_N: D1C.3 IC20C.1 J2.18 R131C.1 | length 902.2
  TopLayer w6: J2.18@7779.23,9024.27 7860.56,9024.27 7922.63,8962.19 7953.74,8962.19 7964.23,8951.71 7978.94,8937 7978.94,8886.7 7989.34,8876.29 7992.86,8872.78 8046.42,8872.78 8079.26,8905.62 8079.26,8924.27 8079.26,8935.75 8067.1,8947.92 8048.97,8947.92 8043.83,8953.06 8043.83,8968.47 8048.97,8973.6 8102.53,8973.6 8114.7,8985.77 8114.7,9011.12 8102.53,9023.29 8084.4,9023.29 8079.26,9028.43 8079.26,9038.2 8082.64,9041.58 8087.26,9046.2 8190.35,9046.2 8190.35,9036.5 8177.85,9024 R131C.1@8177.85,9008.8 v1(8177.85,8980.25) 8165.06,8967.46 IC20C.1@8139.46,8967.46
  Bottom Layer w6: D1C.3@8169.39,8960.57 8169.39,8971.79 v1(8177.85,8980.25)
Z1_P: D1C.4 IC20C.8 J2.5 R131C.2 | length 869.4
  TopLayer w6: J2.5@7929.23,9024.27 7889.53,9024.27 7886.01,9020.75 7886.01,9015.78 7927.6,8974.19 7958.71,8974.19 7981.2,8951.71 7990.94,8941.97 7990.94,8891.67 7997.83,8884.78 8041.45,8884.78 8067.26,8910.59 8067.26,8924.27 8067.26,8930.78 8062.13,8935.92 8044,8935.92 8031.83,8948.09 8031.83,8973.44 8044,8985.6 8097.56,8985.6 8102.7,8990.74 8102.7,9006.15 8097.56,9011.29 8079.43,9011.29 8067.26,9023.46 8067.26,9041.58 8067.26,9043.17 8082.29,9058.2 8195.32,9058.2 8202.35,9051.17 8202.35,9036.5 8214.86,9024 R131C.2@8214.86,9008.8 v1(8214.86,8983.36) 8230.76,8967.46 IC20C.8@8261.51,8967.46
  Bottom Layer w6: v1(8214.86,8983.36) 8224.11,8974.11 8224.11,8968.05 D1C.4@8231.59,8960.57
Z2_N: D1B.3 IC20B.1 J2.17 R131B.1 | length 974.7
  TopLayer w6: IC20B.1@8356.98,8874.94 8382.57,8874.94 v1(8395.37,8887.73) R131B.1@8395.37,8916.28
  Bottom Layer w6: J2.17@7704.23,8974.27 7785.56,8974.27 7834.11,8925.71 7875.63,8925.71 7910.74,8960.83 7968.14,8960.83 8013.01,8915.96 8114.97,8814 8247.61,8814 8289.66,8856.05 8294.63,8856.05 8327.2,8888.62 8328.56,8888.62 8361.14,8921.2 8402.95,8921.2 8407.87,8916.28 8407.87,8900.24 v1(8395.37,8887.73) 8386.91,8879.27 D1B.3@8386.91,8868.05
Z2_P: D1B.4 IC20B.8 J2.4 R131B.2 | length 938.8
  TopLayer w6: R131B.2@8432.38,8916.28 v1(8432.38,8890.84) 8448.28,8874.94 IC20B.8@8479.03,8874.94
  Bottom Layer w6: J2.4@7854.23,8974.27 7814.53,8974.27 7811.01,8970.75 7811.01,8965.78 7839.09,8937.71 7870.65,8937.71 7905.77,8972.83 7973.11,8972.83 8119.94,8826 8242.64,8826 8284.69,8868.05 8289.66,8868.05 8322.23,8900.62 8323.59,8900.62 8356.17,8933.2 8407.92,8933.2 8419.87,8921.25 8419.87,8903.35 v1(8432.38,8890.84) 8441.63,8881.59 8441.63,8875.53 D1B.4@8449.11,8868.05
Z3_N: D1A.3 IC20A.1 J2.15 R131A.1 | length 979.5
  TopLayer w6: IC20A.1@8358.36,8677.14 8383.95,8677.14 v1(8396.75,8689.94) R131A.1@8396.75,8718.48
  Bottom Layer w6: J2.15@7704.23,8874.27 7784.76,8874.27 7802,8857.03 7960.03,8699 8090.03,8699 8168.03,8621 8258.36,8621 8295.61,8658.25 8355.84,8718.48 8409.25,8718.48 8409.25,8702.44 v1(8396.75,8689.94) 8388.28,8681.47 D1A.3@8388.28,8670.25
Z3_P: D1A.4 IC20A.8 J2.2 R131A.2 | length 941.7
  TopLayer w6: R131A.2@8433.76,8718.48 v1(8433.76,8693.05) 8449.66,8677.14 IC20A.8@8480.41,8677.14
  Bottom Layer w6: J2.2@7854.23,8874.27 7852.66,8872.7 7817.67,8872.7 7810.49,8865.51 7965,8711 8095,8711 8173,8633 8253.39,8633 8350.87,8730.48 8414.22,8730.48 8421.25,8723.45 8421.25,8705.55 v1(8433.76,8693.05) 8443.01,8683.8 8443.01,8677.73 D1A.4@8450.49,8670.25
ZCLK_N: D1E.3 IC20E.1 J2.16 R131E.1 | length 957.4
  TopLayer w6: J2.16@7779.23,8924.27 7823.56,8924.27 7827.07,8920.75 7827.07,8915.78 7805.67,8894.38 7805.67,8854.15 7848.23,8811.59 7848.23,8723.56 7909.52,8662.27 7957.14,8662.27 8006.31,8711.45 8006.31,8748.89 8014.44,8757.02 8014.44,8774.22 8001.62,8787.04 8001.62,8794.31 8012.51,8805.2 8019.78,8805.2 8050.06,8774.92 8067.27,8774.92 8085.2,8792.84 8085.2,8810.05 8079.97,8815.28 8079.97,8822.55 8101.68,8844.26 8106.1,8848.68 8187.8,8848.68 8187.8,8831.34 R131E.1@8175.29,8818.83 v1(8175.29,8790.29) 8162.5,8777.5 IC20E.1@8136.91,8777.5
  Bottom Layer w6: D1E.3@8166.83,8770.61 8166.83,8781.83 v1(8175.29,8790.29)
ZCLK_P: D1E.4 IC20E.8 J2.3 R131E.2 | length 1006.9
  TopLayer w6: J2.3@7929.23,8924.27 7889.53,8924.27 7852.53,8924.27 7846.1,8917.84 7817.67,8889.41 7817.67,8859.12 7860.23,8816.57 7860.23,8728.53 7914.49,8674.27 7952.16,8674.27 7994.31,8716.42 7994.31,8753.86 7997.83,8757.38 8002.44,8761.99 8002.44,8769.25 7989.62,8782.07 7989.62,8799.28 8007.54,8817.2 8024.75,8817.2 8055.03,8786.92 8062.3,8786.92 8073.2,8797.81 8073.2,8805.08 8067.97,8810.31 8067.97,8827.52 8093.19,8852.74 8101.13,8860.68 8192.77,8860.68 8199.8,8853.65 8199.8,8831.34 R131E.2@8212.3,8818.83 v1(8212.3,8793.4) 8228.2,8777.5 IC20E.8@8258.95,8777.5
  Bottom Layer w6: v1(8212.3,8793.4) 8221.55,8784.15 8221.55,8778.09 D1E.4@8229.03,8770.61
pads on no net: FTG21.FTG2 FTG22.1 FTG23.1 FTG24.1 IC1.5 IC2.5 IC3.1 IC3.2 IC3.3 IC3.7 IC4.1 IC4.2 IC4.3 IC4.7 IC24.5 IC26.5 IC27.4 IC27.7 J2.7 J2.20

## Polygon pours and split planes (outlines as drawn)
P3V3 on TopLayer "P3V3_L01_P001" (solid, remove dead copper, pour order 1): 10142,6925 10120,6903 10091,6903 10075,6887 10075,6851 10334,6851 10334,7063 10291,7106 10160,7106 10142,7088
P3V3 on TopLayer "TopLayer-P3V3" (solid, remove dead copper, pour order 0): 8943.86,6704.87 9098.34,6704.87 9143.11,6660.1 9143.11,6484.9 9328.15,6484.9 9336.02,6477.02 9336.02,6405.1 9298.6,6367.68 8948.33,6367.68 8908.37,6407.64 8908.37,6669.39
P3V3 on Internal Plane 2 (split plane): 10396.93,6286.1 7626.1,6286.1 7626.1,6604.58 7625.71,6608.5 7624.57,6612.27 7622.71,6615.75 7620.21,6618.79 7582.79,6656.21 7582.79,9795.08 7620.21,9832.5 7622.71,9835.54 7624.57,9839.02 7625.71,9842.79 7626.1,9846.71 7626.1,10182.9 10396.93,10182.9
GND on Layer 1 (split plane): 10396.93,6286.1 7626.1,6286.1 7626.1,6604.58 7625.71,6608.5 7624.57,6612.27 7622.71,6615.75 7620.21,6618.79 7582.79,6656.21 7582.79,9795.08 7620.21,9832.5 7622.71,9835.54 7624.57,9839.02 7625.71,9842.79 7626.1,9846.71 7626.1,10182.9 10396.93,10182.9